# Altium PCB kmetria.PcbDoc
Units mm, origin at the board's own origin, x right, y up, seen from the top; angles counter-clockwise.
Board outline 80.01 x 70.1 mm, 2 copper layers (Top Layer, Bottom Layer); 36 components, 37 nets, 127 pads, 13 vias.
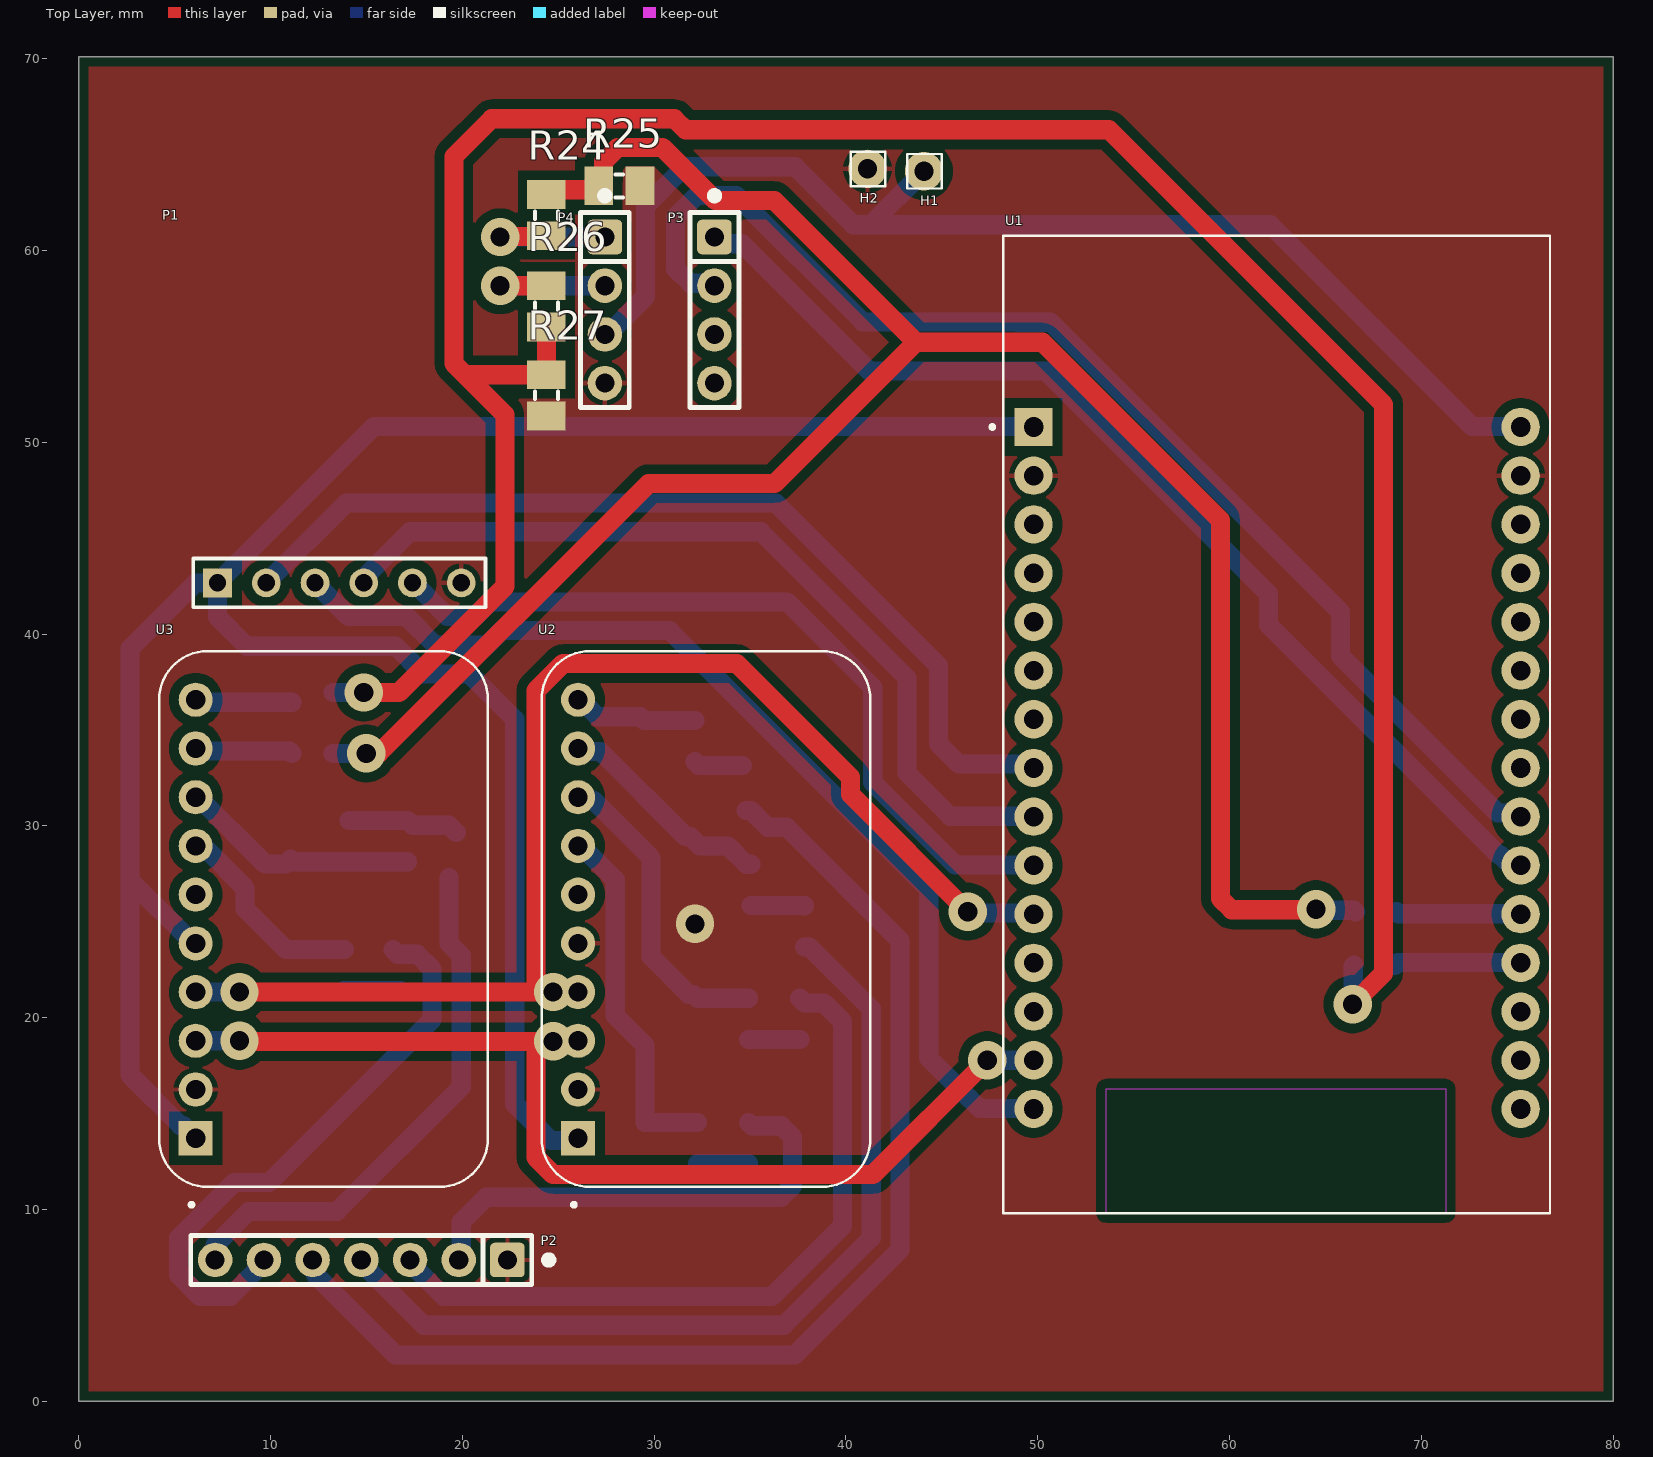
[diagram p0: Top Layer view]
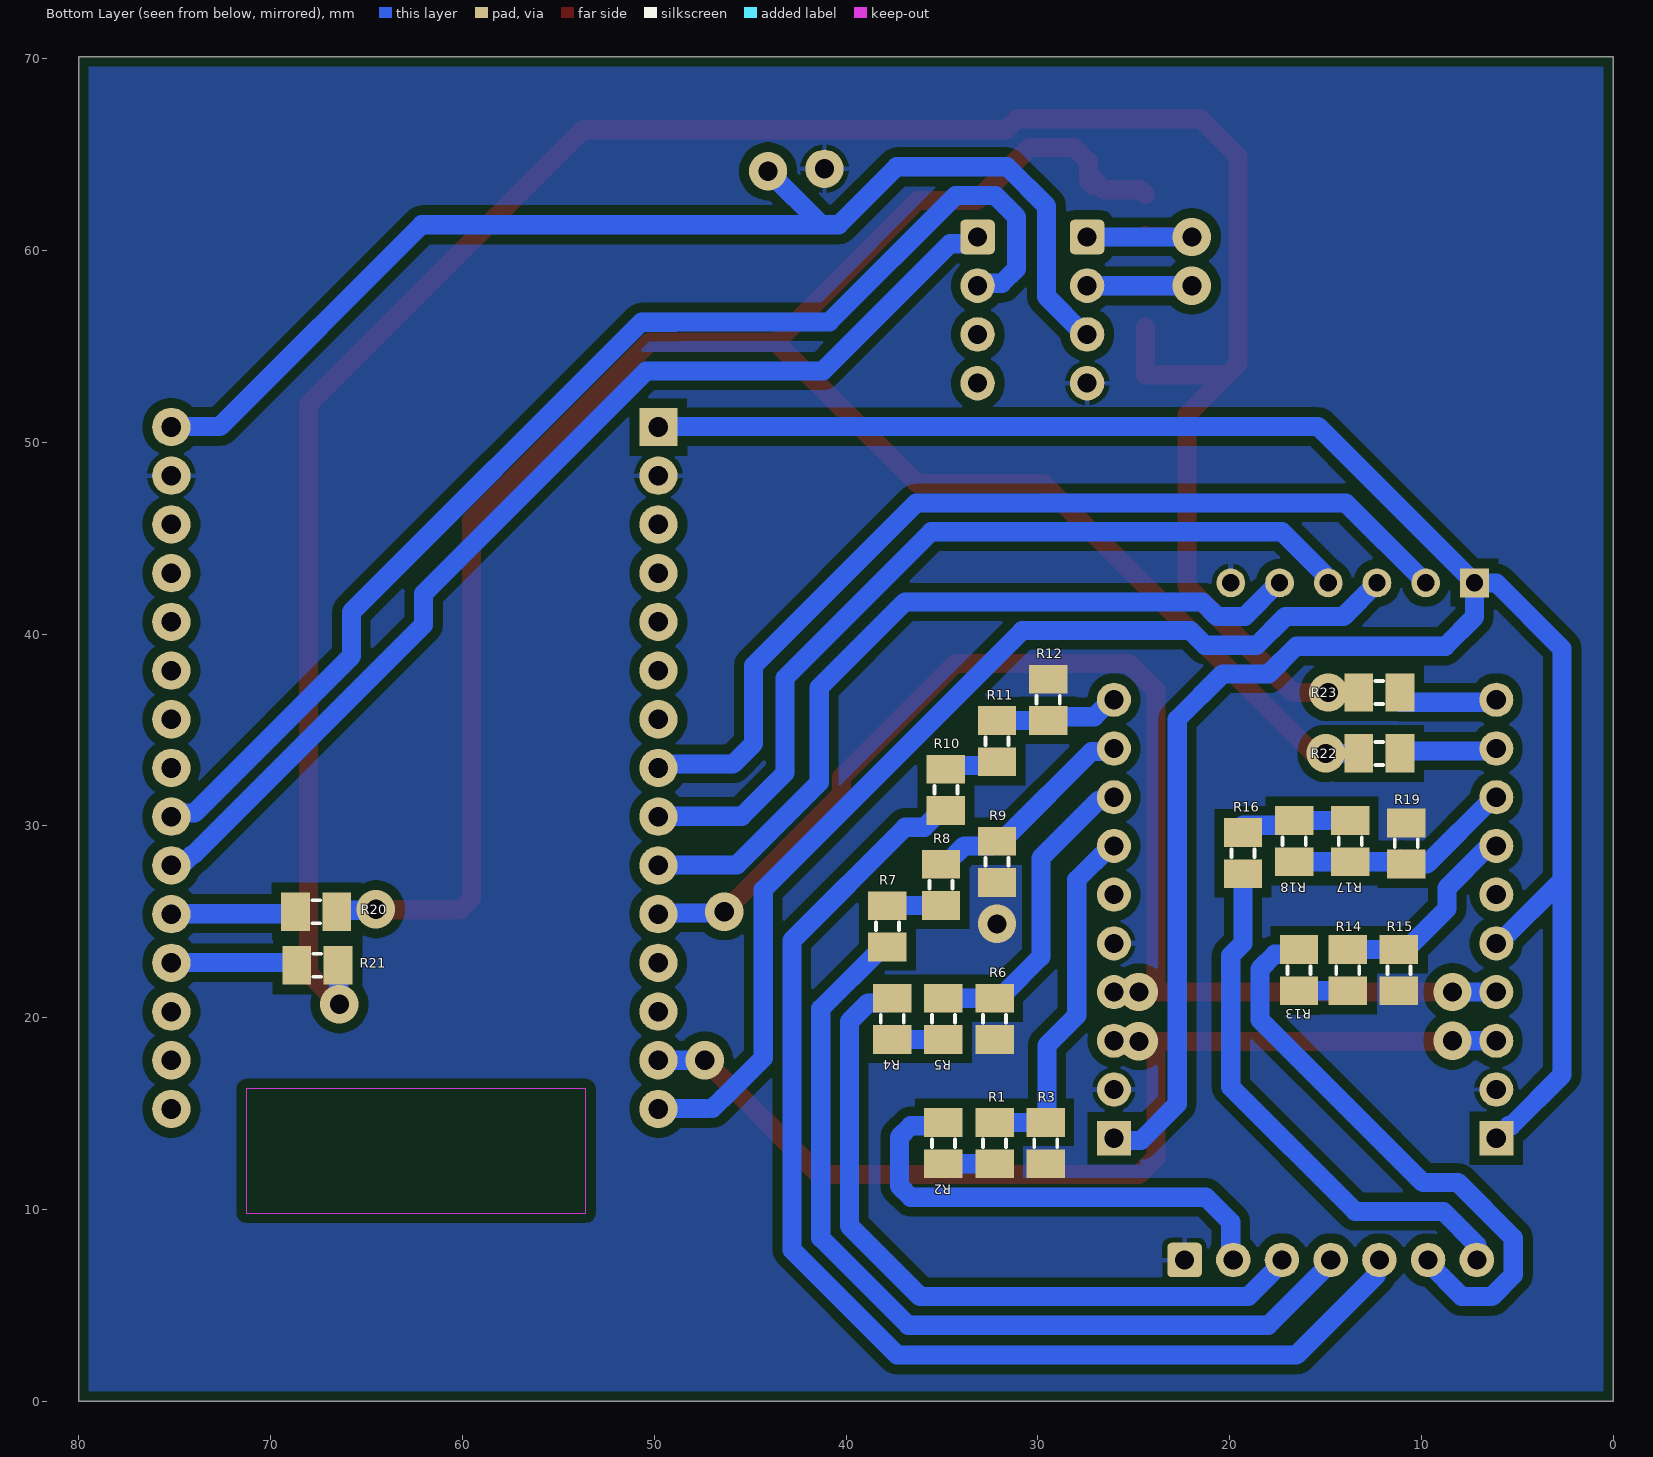
[diagram p1: Bottom Layer view, seen from below]
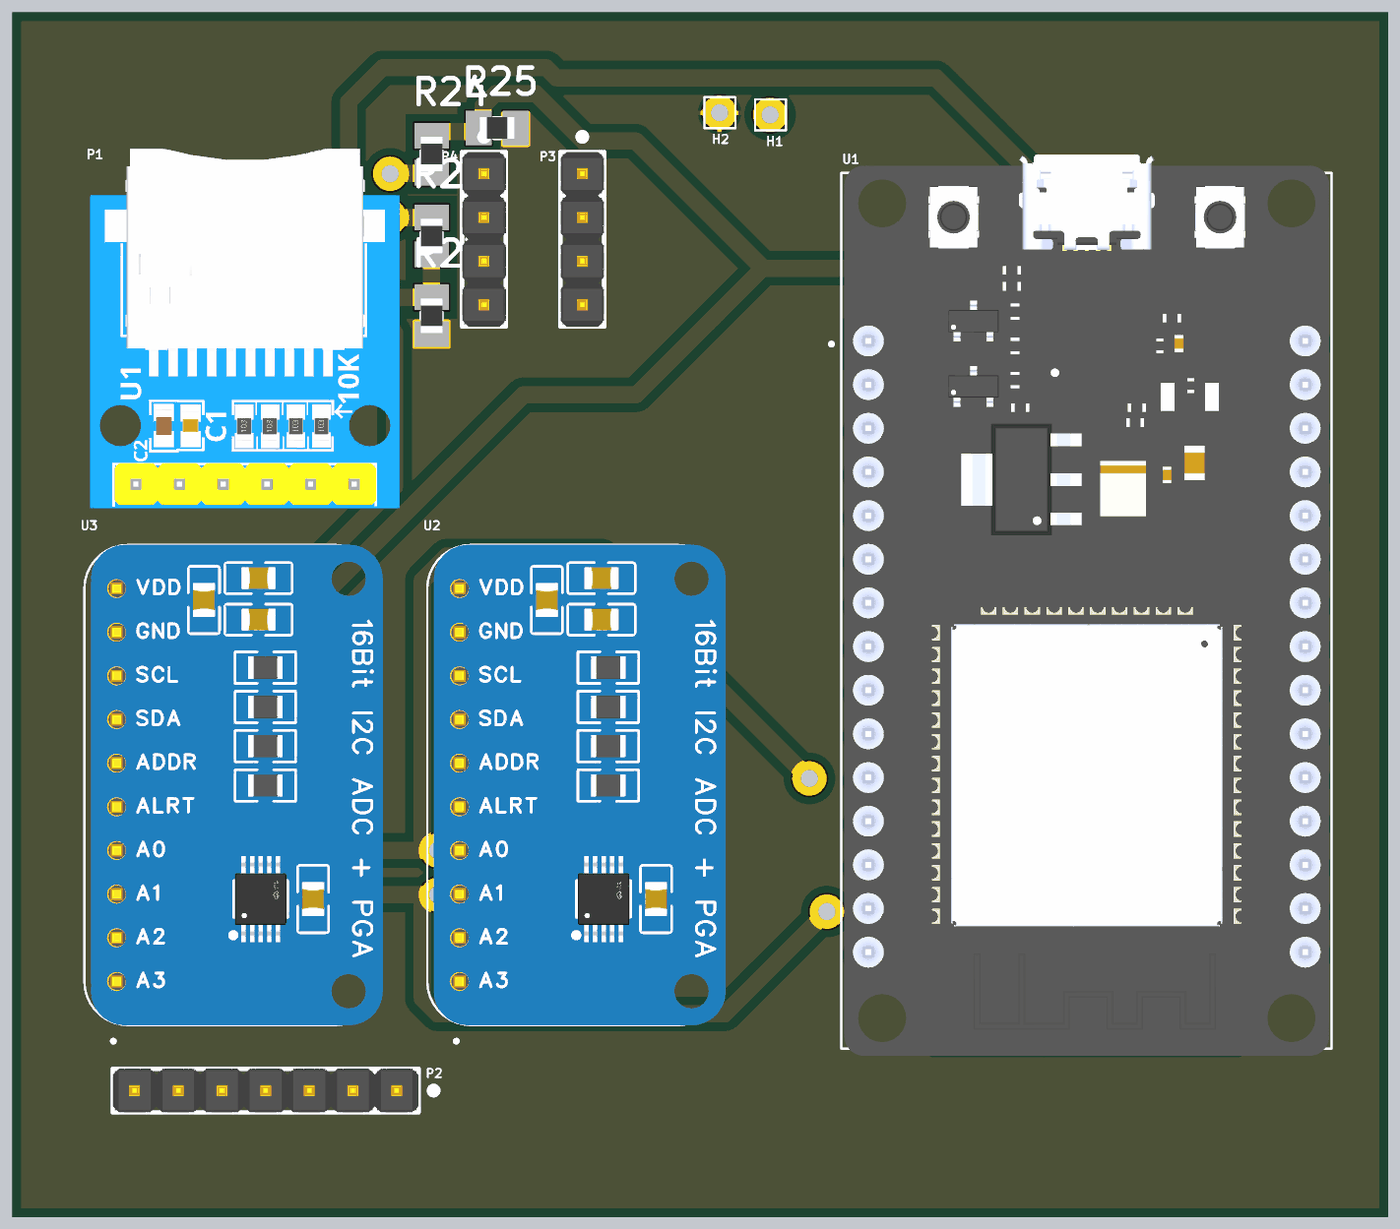
[diagram p2: 3D render of the assembled board from above, using the file's embedded part models]
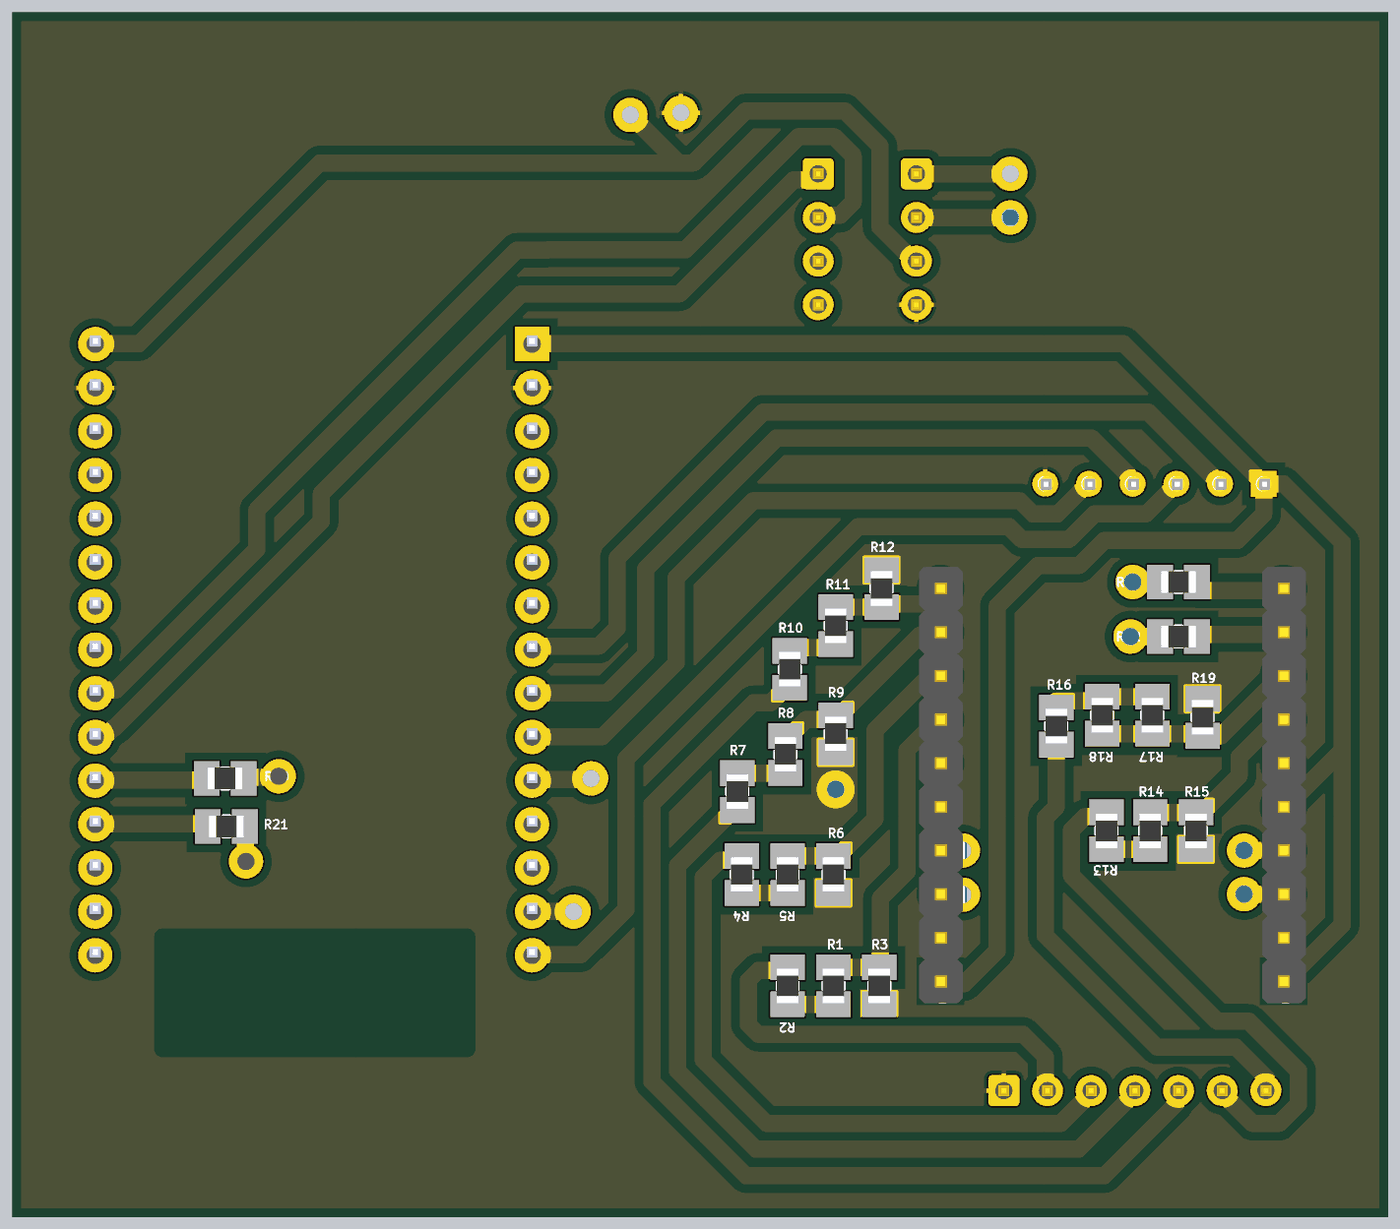
[diagram p3: 3D render of the assembled board from below, using the file's embedded part models]

## Layer stack, top to bottom
Top Solder: solder mask 0.0102, Solder Resist, Dk 3.5
Top Layer: signal copper 0.0356
Dielectric 1: dielectric 0.32, FR-4, Dk 4.8
Bottom Layer: signal copper 0.0356
Bottom Solder: solder mask 0.0102, Solder Resist, Dk 3.5

## Board outline
0,0 80.01,0 80.01,70.104 0,70.104

## Design rules (kind name [scope] priority, off if disabled: settings)
BoardOutlineClearance [All] p1: gap=0.5 ignorepadtopadclearanceinfootprint=FALSE
Clearance Clearance_1 [All] p1: gap=0.5 ignorepadtopadclearanceinfootprint=FALSE
HoleSize [All] p1: absolutevalues=TRUE maxlimit=2.54 minlimit=0.15 maxpercent=80.000 minpercent=20.000
HoleToHoleClearance [All] p1: gap=0.25 allowstackedmicrovias=TRUE
MinimumSolderMaskSliver [All] p1: minsoldermaskwidth=0.1
PlaneClearance [InPadClass('All Pads')] p1: clearance=0.5
PlaneConnect [All] p1: planeconnectstyle=Direct reliefexpansion=0.508 reliefentries=4 reliefconductorwidth=0.254 reliefairgap=0.254
PolygonConnect PolygonConnect_1 [InNet('Vcc') vs InNet('Vcc')] p1: thpad.connectstyle=Relief thpad.reliefconductorwidth=0.254 thpad.reliefentries=4 thpad.polygonreliefangle="90 Angle" thpad.airgapwidth=0.254 smdpad.connectstyle=Direct smdpad.reliefconductorwidth=0.254 smdpad.reliefentries=4 smdpad.polygonreliefangle="90 Angle" smdpad.airgapwidth=0.254 via.connectstyle=Direct via.reliefconductorwidth=0.254 via.reliefentries=4 via.polygonreliefangle="90 Angle" via.airgapwidth=0.254
PolygonConnect [InNet('GND') vs InNet('GND')] p2: thpad.connectstyle=Relief thpad.reliefconductorwidth=0.254 thpad.reliefentries=4 thpad.polygonreliefangle="90 Angle" thpad.airgapwidth=0.254 smdpad.connectstyle=Direct smdpad.reliefconductorwidth=0.3 smdpad.reliefentries=4 smdpad.polygonreliefangle="90 Angle" smdpad.airgapwidth=0.1 via.connectstyle=Direct via.reliefconductorwidth=0.254 via.reliefentries=4 via.polygonreliefangle="90 Angle" via.airgapwidth=0.254
RoutingVias [All] p1: holewidth=0.3 width=0.6 viastyle="Through Hole" minholewidth=0.15 minwidth=0.404 maxholewidth=1 maxwidth=2 // Max via diameter not defined
SilkToSilkClearance [All] p1: silktosilkclearance=0.15
SilkToSolderMaskClearance [IsPad] p1: minsilkscreentomaskgap=0.15 clearancetoexposedcopper=TRUE
SolderMaskExpansion [All] p1: expansion=0.102 istentingtop=FALSE
SupplyNets "Schematic Supply Nets" [InNet('GND')] p1: voltage=0.000
Width [All] p1: maxlimit=2 minlimit=0.1 preferedwidth=1 minimp=50.000000 maximp=50.000000 favimp=50.000000 // Max Width not defined
23 further rules are at their usual default settings.

## Components (designator, comment, footprint, x,y, rotation, side; value= is the part's Value field where it differs from the comment)
H1 "Hole" "Hole 1x1" 44.089,64.135 r0 top
H2 "Hole" "Hole 1x1" 41.148,64.262 r0 top
P1 "MICRO SD" HDR1X6 7.239,42.672 r0 top
P2 "Header Male 1x7" "HDR MALE 1x7" 22.352,7.366 r180 top
P3 "Header 1x4" "HDR MALE 1x4" 33.147,60.706 r270 top
P4 "Header 1x4" "HDR MALE 1x4" 27.432,60.706 r270 top
R1 "1K2" "RESISTOR 0805" 32.258,13.462 r270 bottom
R2 "120Ω" "RESISTOR 0805" 34.925,13.462 r90 bottom
R3 "3K3" "RESISTOR 0805" 29.591,13.462 r90 bottom
R4 "330Ω" "RESISTOR 0805" 37.592,19.939 r90 bottom
R5 "5K6" "RESISTOR 0805" 34.925,19.939 r270 bottom
R6 "3K3" "RESISTOR 0805" 32.258,19.939 r90 bottom
R7 "560Ω" "RESISTOR 0805" 37.846,24.765 r270 bottom
R8 "10k" "RESISTOR 0805" 35.052,26.924 r270 bottom
R9 "3K3" "RESISTOR 0805" 32.131,28.126 r90 bottom
R10 "180Ω" "RESISTOR 0805" 34.798,31.877 r270 bottom
R11 "15K" "RESISTOR 0805" 32.131,34.417 r270 bottom
R12 "3K3" "RESISTOR 0805" 29.464,36.576 r270 bottom
R13 "1K8" "RESISTOR 0805" 16.383,22.479 r90 bottom
R14 "Resistor 1k +/-1% 1206 250 mW" "RESISTOR 0805" 13.843,22.479 r270 bottom value=18K
R15 "3K3" "RESISTOR 0805" 11.176,22.479 r90 bottom
R16 "820Ω" "RESISTOR 0805" 19.304,28.575 r270 bottom
R17 "47K" "RESISTOR 0805" 13.716,29.21 r90 bottom
R18 "47K" "RESISTOR 0805" 16.637,29.21 r90 bottom
R19 "3K3" "RESISTOR 0805" 10.795,29.083 r270 bottom
R20 "0Ω" "RESISTOR 0805" 67.632,25.527 r180 bottom
R21 "0Ω" "RESISTOR 0805" 67.564,22.733 r180 bottom
R22 "0Ω" "RESISTOR 0805" 12.192,33.782 r180 bottom
R23 "0Ω" "RESISTOR 0805" 12.192,36.957 r180 bottom
R24 "10k" "RESISTOR 0805" 24.384,61.849 r270 top
R25 "10k" "RESISTOR 0805" 28.194,63.373 r180 top
R26 "10k" "RESISTOR 0805" 24.384,57.091 r90 top
R27 "10k" "RESISTOR 0805" 24.384,52.451 r90 top
U1 "ESP32-DEVKIT-V1" MODULE_ESP32_DEVKIT_V1 62.484,35.285 r0 top
U2 "ADS1115" MODULE_ZC261500 26.035,13.716 r270 top
U3 "ADS1115" MODULE_ZC261500 6.096,13.716 r270 top

## Footprints (in the part's own frame and the unit in brackets; to place one, negate y for a bottom-side part, rotate by r counter-clockwise, add the part's x,y. Pads: shape width x height; smd on the part's side, far side on the other; paste and mask are expansions set on the pad)
HDR1X6 [mm]
  rect 1.5x1.5 hole 0.9: 1(0,0)
  round 1.5 hole 0.9: 2(2.54,0) 3(5.08,0) 4(7.62,0) 5(10.16,0) 6(12.7,0)
  silkscreen extent -1.27,-1.27 13.97,1.27, body extent -2.7,-1.42 15.3,19.5, height 10.11
"HDR MALE 1x4" [mm] "PinHeader 1x4 TH Pitch 2.54mm"
  rrect25% 1.8x1.8 hole 1: 1(0,0)
  round 1.8 hole 1: 2(2.54,0) 3(5.08,0) 4(7.62,0)
  silkscreen extent -2.3,-1.27 8.89,1.27, body extent -1.27,-1.27 8.89,1.27, height 9.5
"HDR MALE 1x7" [mm] "PinHeader 1x7 TH Pitch 2.54mm"
  rrect25% 1.8x1.8 hole 1: 1(0,0)
  round 1.8 hole 1: 2(2.54,0) 3(5.08,0) 4(7.62,0) 5(10.16,0) 6(12.7,0) 7(15.24,0)
  silkscreen extent -2.3,-1.27 16.51,1.27, body extent -1.27,-1.27 16.51,1.27, height 9.5
"Hole 1x1" [mm] "Generic Hole"
  round 2 hole 1: 1(-0.02,0)
  silkscreen extent -0.9,-0.9 0.9,0.9
MODULE_ESP32_DEVKIT_V1 [mm]
  rect 2x2 / inner round 2 / far side rect 2x2 hole 1.02: 1(-12.7,15.515)
  round 2 hole 1.02: 2(-12.7,12.975) 3(-12.7,10.435) 4(-12.7,7.895) 5(-12.7,5.355) 6(-12.7,2.815) 7(-12.7,0.275) 8(-12.7,-2.265) 9(-12.7,-4.805) 10(-12.7,-7.345) 11(-12.7,-9.885) 12(-12.7,-12.425) 13(-12.7,-14.965) 14(-12.7,-17.505) 15(-12.7,-20.045) 16(12.7,-20.045) 17(12.7,-17.505) 18(12.7,-14.965) 19(12.7,-12.425) 20(12.7,-9.885) 21(12.7,-7.345) 22(12.7,-4.805) 23(12.7,-2.265) 24(12.7,0.275) 25(12.7,2.815) 26(12.7,5.355) 27(12.7,7.895) 28(12.7,10.435) 29(12.7,12.975) 30(12.7,15.515)
  Keep-Out Layer region: 8.78,-25.475 -8.91,-25.475 -8.91,-18.985 8.78,-18.985
  Keep-Out Layer region: 8.78,-25.475 -8.91,-25.475 -8.91,-18.985 8.78,-18.985
  silkscreen extent -14.95,-25.48 14.23,25.48, body extent -14.1,-25.9 14.1,26.55, height 7.05
MODULE_ZC261500 [mil]
  round 70 hole 39.37: 1(-900,0) 2(-800,0) 3(-700,0) 4(-600,0) 5(-500,0) 6(-400,0) 7(-300,0) 8(-200,0) 9(-100,0)
  rect 70x70 hole 39.37: 10(0,0)
  silkscreen extent -1000,-75 141,600, body extent -1001,-60 101,608, height 118
"RESISTOR 0805" [mm] "Chip Resistor, 2-Leads, Body 2,00x1,25mm, IPC Low Density"
  rect 1.5x2 smd: 1(-1.075,0) 2(1.075,0)
  silkscreen extent -0.2,-0.6 0.2,0.6, body extent -1,-0.63 1,0.63, height 0.6

## Part data
H1 H2: "General Purpose hole"
P1: library part "Header Male 1x6", "Headers & Wire Housings 36Pin 2mm Spacing Single Row Hdrs, 5pc", Color=Black, Manufacturer="Molex, LLC", Manufacturer Part Number=0022284360, Supplier Part Number 1=WM50014-36-ND, Category="Connectors, Interconnects", ComponentLink1Description=http://www.molex.com/pdm_docs/sd/022284360_sd.pdf, ComponentLink1URL=http://www.molex.com/pdm_docs/sd/022284360_sd.pdf, Connector Type="Header, Unshrouded, Breakaway", Contact Finish=Tin, Contact Finish Thickness="100µin (2.54µm)", Contact Mating Length="0.240\" (6.10mm)", Contact Type="Male Pin", Fastening Type=-, Features=-, Mounting Type="Through Hole", Number of Positions=36, Number of Positions Loaded=All, Number of Rows=1, Packaging=Bulk, Pitch="0.100\" (2.54mm)", Pricing 1="1=0.98, 10=0.858, 25=0.808, 50=0.7742, 100=0.7405, 250=0.6732, 500=0.60588 (USD)", RoHS="RoHS Compliant", Row Spacing=-, Stock 1=9595, Supplier 1=Digi-Key, Termination=Solder
P2 P3 P4: "Headers & Wire Housings 40Pin 2mm Spacing Single Row Hdrs, 5pc", Manufacturer=Cromax, Manufacturer Part Number=IMP10327, Supplier Part Number 1="Barra de Pinos Simples 1x40 Macho BMO40-1E", Accessory Type=-, Brand=Cromax, Category="Headers & Wire Housings", ComponentLink1Description=http://loja.multcomercial.com.br/barra-de-pinos-simples-1x40-macho-bmo40-1e.html, ComponentLink1URL=http://loja.multcomercial.com.br/barra-de-pinos-simples-1x40-macho-bmo40-1e.html, Contact Gender="Pin (Male)", Contact Plating=Gold, Contact Type=-, Minimum Order Quantity=1, Mounting Angle=Vertical, Mounting Style="Straight Pin", Number of Positions="40 Position", Number of Rows="1 Row", Pitch="2 mm", Pricing 1="1=1.00, 5=0.20 (BRL)", Product=Headers, Product Category=Accessories, Reeling=False, RoHS="RoHS Compliant", RoHS - Mouser=Y, Row Spacing=-, Stock 1=14, Supplier 1="Mult Comercial", Termination Style="Through Hole", Type=Breakaway
R1 R2 R5 R7 R11 R13 R16: library part "RES SMD 5% 0805", "RES SMD 5% 0805", Resistance (Ohms)=10k, Supplier Device Package=0805, Tolerance=±5%, Category=Resistors
R3 R4 R6 R9 R10 R12 R15 R17 R18 R19 R20 R21 R22 R23: library part "RES 5% 0603", "Thick Film Resistors - SMD 0603 5%", Case Code - in=0603, Case Code - mm=1608, Manufacturer=Yageo, Manufacturer Part Number=RC0603JR-071R8L, Operating Temperature Range="- 55 C to + 155 C", Package / Case="0603 (1608 metric)", Power Rating="100 mW", Resistance="1.8 Ohms", Supplier Part Number 1=603-RC0603JR-071R8L, Temperature Coefficient="200 PPM / C", Tolerance="5 %", Voltage Rating="75 V", Brand=Yageo, Category="Thick Film Resistors - SMD", ComponentLink1Description=http://www.mouser.com/ds/2/447/RC0603-272842.pdf, ComponentLink1URL=http://www.mouser.com/ds/2/447/RC0603-272842.pdf, Height="0.45 mm", Length="1.6 mm", Minimum Order Quantity=1, Packaging=Reel, Pricing 1="1=0.100, 10=0.008, 100=0.003, 1000=0.002, 5000=0.002, 50000=0.001 (USD)", Product="Thick Film Resistors General Purpose", Reeling=True, RoHS="RoHS Compliant", RoHS - Mouser=Y, Series=RC, Standard Pack Qty=5000, Stock 1=37637, Supplier 1=Mouser, Termination Style=SMD/SMT, Type="General Purpose Chip Resistor Surface Mount", Width="0.8 mm"
R8 R24 R25 R26 R27: library part "RES SMD 5% 0805", "RES SMD 5% 0805", Supplier Device Package=0805, Tolerance=±5%, Category=Resistors, Resistance (Ohms)=10k
R14: library part "RES 1206", "Chip Resistor, 1 KOhm, +/- 1%, 0.25 W, -55 to 155 degC, 1206 (3216 Metric)"
U1: "Dual core, Wi-Fi: 2.4 GHz up to 150 Mbits/s,BLE (Bluetooth Low Energy) and legacy Bluetooth, 32 bits, Up to 240 MHz", Package=None, Check_prices=https://www.snapeda.com/parts/ESP32-DEVKIT-V1/Do+it/view-part/?ref=eda, MF="Do it", MP=ESP32-DEVKIT-V1, SnapEDA_Link=https://www.snapeda.com/parts/ESP32-DEVKIT-V1/Do+it/view-part/?ref=snap
U2 U3: library part ZC261500, "ADS1115 Module ADC 4 channel with Pro Gain Amplifier for Arduino RPi", Package=None, Availability=Unavailable, MF=YKS, MP=ZC261500, Price=None, SnapEDA_Link=https://www.snapeda.com/parts/ZC261500/YKS/view-part/621058/?ref=snap

## Via types
v1: diameter 2, hole 1, Top Layer to Bottom Layer, 13 vias

## Nets (pads, with @x,y where several pads share a name; then routed paths per layer and width w, separated by ;. In a path a pad name is that pad's centre, name@x,y a point inside that pad or via, vN(x,y) a via of type N, cw(c..) or ccw(c..) an arc to the next point about the centre after c; other vN are vias at no path point)
1S: P2.2 R2.2 | length 25.1
  Bottom Layer w1: P2.2@19.939,7.493 19.939,9.343 21.233,10.637 36.625,10.637 37.211,11.223 37.211,13.78 36.625,14.366 35.096,14.366 R2.2
2S: P2.3 R4.2 | length 38.3
  Bottom Layer w1: P2.3 17.272,7.219 19.03,5.461 36.143,5.461 39.823,9.141 39.823,19.797 38.856,20.764 37.842,20.764 R4.2
3S: P2.4 R7.2 | length 46.7
  Bottom Layer w1: P2.4 14.732,7.219 17.99,3.961 36.765,3.961 41.323,8.519 41.323,20.463 38.096,23.69 R7.2
3V3: P1.1 U1.1 U2.10 U3.6 U3.10 | length 126.9
  Bottom Layer w1: U3.10 5.445,14.367 5.314,14.367 2.667,17.014 2.667,27.174 ; U3.6 5.965,23.876 2.667,27.174 ; U2.10@25.781,13.589 24.638,13.589 22.733,15.494 22.733,35.56 20.371,37.922 17.971,37.922 16.523,39.37 8.763,39.37 7.239,40.894 P1.1 ; U1.1@49.53,50.821 15.388,50.821 P1.1 ; 2.667,27.174 2.667,39.243 6.096,42.672 P1.1
4S: P2.5 R10.2 | length 62.3
  Bottom Layer w1: P2.5 12.345,7.213 12.345,6.578 16.51,2.413 37.338,2.413 42.823,7.898 42.823,24.027 36.923,29.927 35.923,29.927 35.048,30.802 R10.2
5S: P2.6 R13.2 | length 30.6
  Bottom Layer w1: P2.6@9.652,7.219 7.899,5.466 6.325,5.466 5.212,6.579 5.212,8.514 8.099,11.401 9.925,11.401 13.238,14.714 18.415,19.891 18.415,22.536 17.647,23.304 16.633,23.304 R13.2
6S: P2.7 R16.2 | length 27.6
  Bottom Layer w1: P2.7@7.112,8.001 7.112,8.148 8.865,9.901 13.457,9.901 19.939,16.383 19.939,23.241 19.304,23.876 R16.2@19.304,27.305
CLK: P1.4 U1.9 | length 45
  Bottom Layer w1: P1.4 14.859,42.807 15.109,43.057 15.109,43.176 17.272,45.339 35.56,45.339 43.18,37.719 43.18,32.766 45.445,30.501 U1.9@49.53,30.501
CORRENTE_1: R20.2 R22.1 R24.1 R25.2 | length 111.3
  Top Layer w1: v1(14.986,33.782) 15.645,33.782 29.714,47.85 36.285,47.85 43.651,55.216 ; R24.1 24.634,63.174 26.535,63.174 R25.2@27.119,63.758 ; R25.2 27.369,63.623 27.369,64.637 28.105,65.373 30.433,65.373 33.2,62.606 36.261,62.606 43.651,55.216 ; v1(64.516,25.654) 64.487,25.625 60.112,25.625 59.526,26.211 59.526,45.945 50.255,55.216 43.651,55.216
  Bottom Layer w1: R22.1 v1(14.986,33.782) ; v1(64.516,25.654) 64.568,25.602 66.482,25.602 R20.2
CORRENTE_2: R21.2 R23.1 R26.1 R27.2 | length 131
  Top Layer w1: v1(14.859,36.957) 16.699,36.957 22.225,42.483 22.225,51.445 20.144,53.526 ; R26.1 R27.2 20.144,53.526 ; v1(66.421,20.701) 68.035,22.315 68.035,51.98 53.721,66.294 31.634,66.294 31.055,66.873 21.534,66.873 19.558,64.897 19.558,54.112 20.144,53.526
  Bottom Layer w1: R23.1 v1(14.859,36.957) ; v1(66.421,20.701) 66.455,20.735 66.455,22.699 R21.2
CS: P1.2 U1.8 | length 49.5
  Bottom Layer w1: P1.2 13.946,46.839 36.346,46.839 44.831,38.354 44.831,34.29 45.889,33.232 U1.8@49.53,33.232
D21: U1.11 U2.7 U3.7 | length 67.9
  Top Layer w1: v1(8.382,21.336) v1@23.844,21.336 ; v1(24.733,21.336) v1@23.844,21.336 ; v1(46.355,25.527) 40.235,31.647 40.235,32.536 34.306,38.465 25.253,38.465 23.844,37.056 v1@23.844,21.336
  Bottom Layer w1: U3.7 v1(8.382,21.336) ; v1(24.733,21.336) U2.7 ; v1(46.355,25.527) 46.419,25.463 49.466,25.463 U1.11@49.53,25.4
D22: U1.14 U2.8 U3.8 | length 54.4
  Top Layer w1: v1(8.382,18.796) 8.414,18.764 v1(24.733,18.764) ; v1@23.844,18.669 23.844,12.715 24.732,11.827 41.418,11.827 v1(47.371,17.78)
  Bottom Layer w1: U3.8 v1(8.382,18.796) ; v1(24.733,18.764) 24.749,18.78 26.019,18.78 U2.8 ; v1(47.371,17.78) U1.14@49.53,17.78
GND: H2.1 P1.6 P2.1 P4.4 R3.1 R6.1 R9.1 R12.1 R15.1 R19.1 R25.1 R27.1 U1.2 U1.29 U2.6 U2.9 U3.9
  other v1: 32.131,24.892
MISO: P1.5 U1.10 | length 41.8
  Bottom Layer w1: P1.5 17.464,42.672 19.214,40.922 20.664,40.922 21.424,41.682 36.931,41.682 41.402,37.211 41.402,32.258 45.699,27.961 U1.10@49.53,27.961
MOSI: P1.3 U1.15 | length 54.1
  Bottom Layer w1: P1.3 14.069,40.922 17.093,40.922 18.593,39.422 21.285,39.422 22.045,40.182 30.811,40.182 44.323,26.67 44.323,17.894 46.416,15.801 46.433,15.801 46.973,15.261 ; 47.244,15.261 U1.15@49.53,15.261
NetP4_1: P4.1 R24.2 | length 7.9
  Top Layer w1: v1(21.971,60.706) 22.005,60.74 24.35,60.74 R24.2
  Bottom Layer w1: v1(21.971,60.706) P4.1
NetP4_2: P4.2 R26.2 | length 7.9
  Top Layer w1: v1(21.971,58.166) R26.2
  Bottom Layer w1: v1(21.971,58.166) P4.2
NetR1_2: R1.2 R2.1 | length 2.7
  Bottom Layer w1: R1.2 R2.1
NetR4_1: R4.1 R5.2 | length 2.7
  Bottom Layer w1: R5.2 R4.1
NetR7_1: R7.1 R8.2 | length 2.8
  Bottom Layer w1: R8.2 35.056,25.845 37.841,25.845 R7.1
NetR10_1: R10.1 R11.2 | length 2.6
  Bottom Layer w1: R11.2 32.326,33.147 R10.1@34.603,33.147
NetR13_1: R13.1 R14.2 | length 2.9
  Bottom Layer w1: R14.2 R13.1@16.764,21.404
NetR16_1: R16.1 R17.2 R18.2 | length 5.9
  Bottom Layer w1: R17.2@14.097,30.285 17.145,30.285 17.395,30.035 19.304,30.035 R16.1@19.689,29.65
NetR20_1: R20.1 U1.20 | length 6.3
  Bottom Layer w1: R20.1 68.813,25.421 74.909,25.421 U1.20@74.93,25.4
NetR21_1: R21.1 U1.19 | length 6.4
  Bottom Layer w1: R21.1 68.787,22.881 74.909,22.881 U1.19@74.93,22.86
NetR22_2: R22.2 U3.2 | length 4.7
  Bottom Layer w1: U3.2@6.477,33.909 10.99,33.909 R22.2
NetR23_2: R23.2 U3.1 | length 4.6
  Bottom Layer w1: U3.1@6.477,36.449 R23.2@11.117,36.449
PINO_EXTRA: P3.2 U1.22 | length 64.1
  Bottom Layer w1: P3.2 33.021,58.292 31.878,58.292 31.115,59.055 31.115,61.756 32.224,62.865 34.29,62.865 40.874,56.281 48.893,56.281 48.914,56.26 50.674,56.26 65.786,41.148 65.786,38.862 73.977,30.671 74.739,30.671 U1.22@74.93,30.48
RECEPTOR: P3.1 U1.21 | length 56.5
  Bottom Layer w1: P3.1 33.5,60.353 34.583,60.353 41.215,53.721 50.419,53.721 62.035,42.105 62.035,40.492 74.047,28.48 74.119,28.48 74.77,27.829 U1.21@75.041,27.829
SINAL_1S: R1.1 R3.2 U2.4 | length 18.6
  Bottom Layer w1: U2.4 26.204,28.956 27.972,27.188 27.972,20.113 29.529,18.556 R3.2@29.529,14.537 ; R3.2 R1.1
SINAL_2S: R5.1 R6.2 U2.3 | length 16
  Bottom Layer w1: U2.3 26.184,31.347 26.819,31.347 29.845,28.321 29.845,23.177 31.809,21.213 R6.2@32.059,21.213 ; R6.2 R5.1
SINAL_3S: R8.1 R9.2 U2.2 | length 11.6
  Bottom Layer w1: U2.2@25.912,33.909 25.934,33.887 27.195,33.887 31.631,29.451 31.881,29.451 32.381,28.951 33.85,28.951 34.802,27.999 R8.1
SINAL_4S: R11.1 R12.2 U2.1 | length 6.5
  Bottom Layer w1: U2.1@25.992,36.449 26.293,36.449 27.055,35.687 29.278,35.687 29.469,35.496 32.127,35.496 R11.1
SINAL_5S: R14.1 R15.2 U3.4 | length 10.2
  Bottom Layer w1: U3.4@6.477,28.829 6.608,28.829 8.673,26.765 8.673,25.68 10.799,23.554 11.049,23.554 R14.1
SINAL_6S: R17.1 R18.1 R19.2 U3.3 | length 12.3
  Bottom Layer w1: U3.3 6.227,31.496 9.715,28.008 R19.2 ; R19.2@11.053,28.258 11.176,28.135 R17.1 R18.1 R18.1@17.145,28.135
VIN: H1.1 P4.3 U1.30 | length 63.5
  Bottom Layer w1: P4.3 27.579,55.626 29.555,57.602 29.555,62.318 31.602,64.365 37.362,64.365 40.386,61.341 41.275,61.341 ; H1.1 41.275,61.341 ; U1.30@74.93,50.8 74.909,50.821 72.644,50.821 62.124,61.341 41.275,61.341
pads on no net: P3.3 P3.4 U1.3 U1.4 U1.5 U1.6 U1.7 U1.12 U1.13 U1.16 U1.17 U1.18 U1.23 U1.24 U1.25 U1.26 U1.27 U1.28 U2.5 U3.5

## Polygon pours and split planes (outlines as drawn)
GND on Top Layer "GND_L01_P001" (solid, pour order 1): 0,0 80.01,0 80.01,70.104 0,70.104
GND on Bottom Layer "GND_L02_P000" (solid, pour order 0): 0,70.104 0,0 80.01,0 80.01,70.104